# Altium PCB electrodes_interface_pcb.PcbDoc (part 4 of 4)
Units mm, origin at the board's own origin, x right, y up, seen from the top; angles counter-clockwise.
Board outline 433.27 x 43.31 mm, 4 copper layers (Top Layer, Signal Layer 1, Signal Layer 2, Bottom Layer), stack 1.308 mm thick; 42 components, 52 nets, 166 pads, 143 vias.
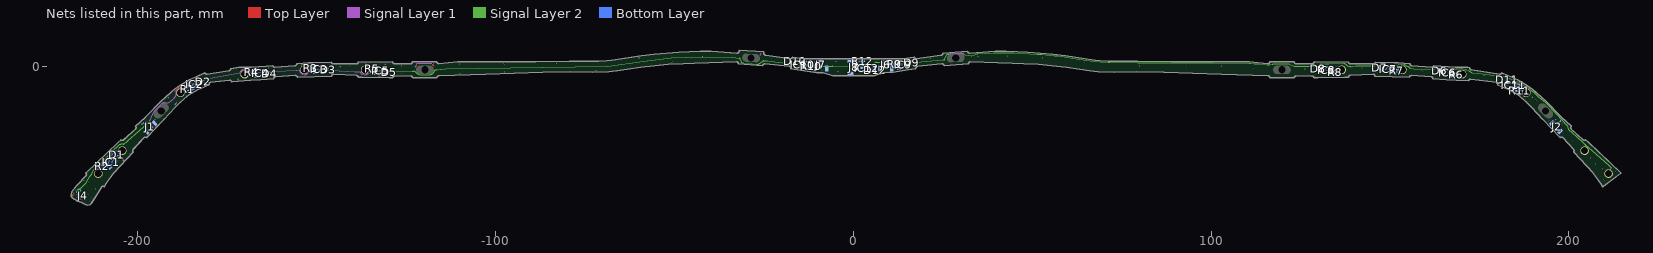
[diagram p6: the nets of this part, all layers, seen from the top]

## Via types
v1: diameter 0.4, hole 0.2, Top Layer to Bottom Layer, tented both sides, 143 vias

## Nets (pads, with @x,y where several pads share a name; then routed paths per layer and width w, separated by ;. In a path a pad name is that pad's centre, name@x,y a point inside that pad or via, vN(x,y) a via of type N, cw(c..) or ccw(c..) an arc to the next point about the centre after c; other vN are vias at no path point) (continued)
BIAS: J4.2 pad.1@204.398,-23.401 pad.1@211.098,-29.801 | length 467.7
  Signal Layer 1 w0.09: -153.874,-2.102 -153.576,-2.119 ccw(c-153.498,-0.801) -153.496,-2.121 -153.202,-2.121
  Signal Layer 1 w0.1: -153.216,-2.106 -153.178,-2.089 cw(c-153.136,-2.18) -153.162,-2.083
  Signal Layer 1 w0.12: -153.216,-2.106 ccw(c-153.498,-0.801) -153.118,-2.081 -152.881,-2.011 ccw(c-152.915,-1.896) -152.858,-2.001
  Signal Layer 1 w0.17: v1(-196.684,-15.228) -195.766,-12.895 -195.651,-12.648 cw(c-194.417,-13.22) -195.38,-12.26 -193.539,-10.419 cw(c-192.579,-11.382) -192.521,-10.023 -191.536,-10.065 ; -191.539,-10.068 -191.536,-10.065 ; -191.516,-10.066 -191.536,-10.065 ; -191.236,-9.802 -189.897,-8.688 ccw(c-190.005,-8.557) -189.873,-8.664 -189.457,-8.147 ccw(c-189.59,-8.04) -189.42,-8.033 -189.457,-7.267 cw(c-188.098,-7.201) -187.701,-5.901 -187.026,-6.107 ; -191.181,-9.763 -191.495,-10.03 -191.536,-10.065 ; -187.004,-6.116 ccw(c-187.096,-5.689) -186.82,-6.027 -186.799,-6.018 -186.798,-6.018 -183.778,-4.734 -180.571,-3.184 cw(c-180.497,-3.338) -180.526,-3.17 -180.135,-3.103 -172.283,-1.762 -171.631,-1.688 ccw(c-171.65,-1.519) -171.489,-1.573 cw(c-170.198,-2.001) -169.248,-1.028 -168.844,-1.423 ; -168.844,-1.423 ccw(c-168.726,-1.301) -168.785,-1.461 -168.399,-1.605 ; -168.455,-1.584 -161.973,-1.263 -161.478,-1.239 -155.819,-0.889 -155.66,-0.88 -155.038,-0.843 -154.865,-0.962 -154.836,-1.053 -154.823,-1.111 ccw(c-153.498,-0.801) -153.893,-2.103 ; -154.836,-1.053 -154.831,-1.072 ; -152.858,-2.001 ccw(c-153.498,-0.801) -152.146,-0.944 -152.131,-0.798 cw(c-151.969,-0.852) -151.999,-0.684 ; -151.998,-0.684 -151.896,-0.667 ; -151.892,-0.655 cw(c-151.537,-1.574) -151.197,-0.65 -149.898,-0.64 -145.774,-0.893 -139.425,-1.283 ; -139.424,-1.283 -138.474,-1.337 -138.063,-1.359 -137.441,-1.972 -137.353,-2.019 -137.27,-2.035 -136.762,-2.136 ccw(c-136.498,-0.801) -135.926,-2.035 ccw(c-136.498,-0.801) -135.916,-2.031 -135.133,-1.659 -134.577,-1.242 cw(c-134.346,-1.549) -134.358,-1.164 v1(-132.257,-1.099)
  Signal Layer 2 w0.095: 26.579,3.638 27.106,3.717 cw(c27.303,2.409) 27.205,3.728 27.738,3.768
  Signal Layer 2 w0.1: 27.738,3.768 29.804,3.912 cw(c29.897,2.591) 29.821,3.914 29.934,3.92 29.936,3.92
  Signal Layer 2 w0.11: 29.936,3.92 30.01,3.921 cw(c30.011,3.811) 30.012,3.921 30.013,3.921
  Signal Layer 2 w0.12: 30.013,3.921 30.15,3.916 cw(c30.146,3.796) 30.151,3.916 30.155,3.916
  Signal Layer 2 w0.15: 30.155,3.916 30.43,3.885
  Signal Layer 2 w0.17: -206.131,-22.631 ccw(c-206.25,-22.51) -206.127,-22.627 -205.697,-22.177 cw(c-204.398,-23.401) -204.122,-21.638 ; -204.121,-21.638 ccw(c-204.096,-21.47) -204,-21.611 ; -203.985,-21.594 -203.629,-21.356 ; -203.668,-21.386 -203.237,-21.094 ccw(c-203.332,-20.954) -203.205,-21.067 -202.991,-20.827 -202.879,-20.703 cw(c-202.704,-20.859) -202.86,-20.683 -199.598,-17.802 v1(-196.684,-15.228) ; v1(-132.257,-1.099) -131.754,-1.201 -131.483,-1.126 -131.101,-1.018 cw(c-130.929,-1.63) -130.916,-0.995 -128.726,-1.035 -128.722,-1.035 ; -128.721,-1.035 -128.028,-1.047 -123.3,-1.133 -122.94,-1.139 cw(c-122.953,-1.874) -122.443,-1.344 ; -122.475,-1.345 -122.065,-1.758 ccw(c-121.098,-0.801) -121.671,-2.035 ccw(c-121.098,-0.801) -121.098,-2.161 -118.498,-2.161 ccw(c-118.498,-0.801) -117.926,-2.035 ccw(c-118.498,-0.801) -117.297,-1.44 -117.1,-1.068 cw(c-116.95,-1.148) -117.077,-1.035 -116.97,-0.913 ; -116.974,-0.92 -116.97,-0.913 ; -116.899,-0.833 -116.921,-0.858 ; -116.4,-0.765 -116.876,-0.813 -116.921,-0.858 ; -116.97,-0.913 -116.959,-0.896 -116.921,-0.858 ; -116.97,-0.913 -116.921,-0.858
  Signal Layer 2 w0.2: v1(-217.14,-35.433) -217.095,-35.017 cw(c-216.698,-35.06) -217.074,-34.924 -216.904,-34.454 cw(c-216.528,-34.589) -216.812,-34.309 -216.721,-34.217 cw(c-216.579,-34.358) -216.587,-34.158 -216.428,-34.152 ; -216.427,-34.152 cw(c-216.42,-34.352) -216.346,-34.166 ; -216.345,-34.166 cw(c-216.42,-34.352) -216.34,-34.169 -216.33,-34.172 ccw(c-216.272,-33.98) -216.131,-34.122 -216.054,-34.047 -215.964,-33.959 ccw(c-216.104,-33.816) -215.959,-33.953 -214.49,-32.397 -213.357,-30.403 -213.007,-30.084 -212.873,-29.953 -212.68,-29.342 cw(c-212.489,-29.402) -212.661,-29.3 -212.474,-28.984 cw(c-211.098,-29.801) -212.036,-28.505 -211.82,-28.349 ccw(c-211.937,-28.187) -211.795,-28.327 -207.166,-23.65 -206.148,-22.621
  Signal Layer 2 w0.22: -30.61,1.105 -28.538,0.946 -28.357,0.922 ccw(c-28.329,1.14) -28.344,0.921 -26.982,0.819 -26.633,0.793
  Signal Layer 2 w0.25: -116.4,-0.765 -115.356,-0.659 -115.354,-0.658 -115.343,-0.658 -115.339,-0.658 -115.331,-0.658 ; -115.33,-0.658 -115.242,-0.655 -115.233,-0.646 -115.207,-0.643 -113.905,-0.511 -68.625,0.23 -68.609,0.232 -58.803,1.656 ; -58.802,1.656 cw(c-58.767,1.408) -58.795,1.657 -51.993,2.435 -50.954,2.554 ; -50.953,2.554 cw(c-50.925,2.305) -50.934,2.555 -42.198,2.854 cw(c-42.189,2.604) -42.183,2.854 -33.806,2.67 -31.854,2.413 cw(c-31.886,2.165) -31.694,2.325 ; -31.718,2.339 -31.71,2.319 -31.31,1.306 ccw(c-31.078,1.398) -31.101,1.149 ; -31.1,1.149 -30.614,1.106 ccw(c-30.591,1.355) -30.611,1.106 ; -26.543,0.801 ccw(c-26.524,1.05) -26.376,0.849 -25.283,1.657 -25.226,1.698 cw(c-25.117,1.474) -25.119,1.724 -24.997,1.725 -24.102,1.732 cw(c-24.1,1.482) -24.071,1.73 -20.929,1.363 cw(c-20.958,1.115) -20.922,1.362 -17.485,0.869 -17.08,0.811 -16.683,0.754 -14.203,0.328 cw(c-14.246,0.081) -14.097,0.282 -14.095,0.281 ccw(c-13.849,0.627) -13.846,0.202 -5.849,0.26 ; -5.848,0.26 cw(c-5.847,0.01) -5.842,0.26 2.57,0.108 2.582,0.109 4.49,0.226 ; 4.49,0.226 ccw(c4.474,0.475) 4.61,0.265 6.223,1.308 cw(c6.454,0.951) 6.453,1.376 7.274,1.377 cw(c7.275,1.127) 7.285,1.377 14.809,1.078 14.814,1.078 14.83,1.078 17.485,1.315 24.997,1.986 25.477,2.029 25.566,2.118 26.128,3.426 ; 26.128,3.427 cw(c26.358,3.328) 26.324,3.575 26.452,3.592 26.584,3.61 ; 30.43,3.885 30.432,3.885 cw(c30.361,3.645) 30.473,3.868 ; 30.474,3.868 30.532,3.838 cw(c29.897,2.591) 30.749,3.701 31.198,3.357 31.211,3.347 32.208,3.26 32.983,3.192 ccw(c33.004,3.441) 33.071,3.2 34.685,3.646 cw(c34.752,3.405) 34.733,3.654 36.891,3.815 39.27,3.991 39.771,4.028 ; 39.772,4.029 cw(c39.79,3.779) 39.795,4.029 44.94,3.928 cw(c44.935,3.678) 44.949,3.928 49.257,3.69 51.356,3.575 52.602,3.506 ; 52.603,3.506 cw(c52.589,3.257) 52.612,3.506 56.088,3.183 56.167,3.175 57.275,3.072 ; 57.275,3.072 cw(c57.251,2.823) 57.288,3.071 59.76,2.709 61.357,2.475 64.268,2.049 65.118,1.925 67.275,1.61 ; 67.275,1.61 ccw(c67.311,1.857) 67.28,1.609 68.948,1.403 ccw(c68.988,1.726) 68.958,1.402 68.973,1.401 ccw(c69.003,1.724) 68.988,1.4 71.181,1.3 ccw(c71.196,1.625) 71.186,1.3 71.191,1.3 ccw(c71.201,1.625) 71.198,1.3 71.604,1.296 79.422,1.225 ; 79.423,1.225 85.203,1.202 88.922,1.175 ; 88.924,1.175 100.918,1.133 110.603,1.099 cw(c110.603,0.849) 110.628,1.098 110.986,1.061 112.116,0.945 113.272,0.826 115.65,0.582 ccw(c115.676,0.83) 115.703,0.582 116.4,0.659 117.087,0.734 ccw(c116.966,1.837) 117.422,0.825 121.731,0.825 cw(c121.731,0.575) 121.826,0.807 122.683,0.453 cw(c122.588,0.222) 122.704,0.443 123.244,0.159 ccw(c123.36,0.38) 123.263,0.15 ccw(c123.36,0.38) 123.3,0.138 ccw(c123.36,0.38) 123.363,0.13 124.505,0.144 124.846,0.15 127.761,0.202 ; 127.762,0.202 cw(c127.766,-0.048) 127.775,0.202 128.726,0.167 128.752,0.166 129.201,0.15 129.681,0.133 ; 129.682,0.133 ccw(c129.69,0.383) 129.782,0.15 ccw(c129.69,0.383) 129.839,0.182 130.706,0.826 130.719,0.836 cw(c130.868,0.635) 130.863,0.885 132.899,0.927 cw(c132.904,0.677) 132.901,0.927 137.206,0.97 cw(c137.209,0.72) 137.361,0.918 137.481,0.826 138.064,0.378 ; 138.064,0.378 ccw(c138.216,0.577) 138.155,0.334 138.473,0.253 138.881,0.15 139.028,0.113 ; 139.029,0.112 ccw(c139.09,0.355) 139.125,0.107 139.43,0.15 140.407,0.287 ; 140.408,0.287 cw(c140.441,0.039) 140.441,0.289 145.608,0.289 ; 145.609,0.289 ccw(c145.608,0.539) 145.648,0.292 145.774,0.313 146.987,0.518 ; 146.988,0.518 cw(c147.029,0.271) 147.025,0.521 150.134,0.564 150.14,0.564 151.429,0.496 151.472,0.494 ; 151.473,0.494 153.104,0.725 cw(c153.139,0.478) 153.169,0.726 ; 153.169,0.726 154.051,0.617 cw(c154.021,0.369) 154.15,0.583 ; 154.151,0.582 154.86,0.15 155.073,0.101 ; 155.074,0.101 cw(c155.017,-0.142) 155.188,0.04 155.471,-0.227 155.54,-0.291 ; 155.541,-0.292 ccw(c155.711,-0.109) 155.66,-0.354 ccw(c155.711,-0.109) 155.684,-0.358 156.7,-0.464 ; 156.701,-0.464 ccw(c156.726,-0.216) 156.709,-0.465 161.796,-0.795 ; 161.796,-0.795 ccw(c161.812,-0.545) 161.903,-0.778 161.973,-0.75 162.222,-0.652 162.834,-0.411 cw(c162.926,-0.643) 162.93,-0.393 164.603,-0.421 ; 164.604,-0.421 cw(c164.599,-0.671) 164.609,-0.421 166.653,-0.502 166.824,-0.508 ; 166.824,-0.518 167.267,-0.529 ccw(c167.273,-0.279) 167.28,-0.529 170.129,-0.434 cw(c170.138,-0.683) 170.192,-0.439 ; 170.192,-0.44 171.268,-0.68 cw(c171.258,-0.93) 171.388,-0.716 172.048,-1.118 172.218,-1.222 ; 172.219,-1.223 ccw(c172.349,-1.008) 172.235,-1.231 172.283,-1.256 172.924,-1.586 ; 172.925,-1.586 ccw(c173.039,-1.364) 173.024,-1.613 174.643,-1.711 ; 174.644,-1.711 cw(c174.628,-1.961) 174.662,-1.713 176.984,-2.035 179.655,-2.406 cw(c179.62,-2.653) 179.682,-2.411 180.832,-2.705 ; 180.833,-2.705 ccw(c180.894,-2.463) 180.883,-2.712 181.148,-2.724 181.818,-2.754 cw(c181.807,-3.004) 181.868,-2.762 183.477,-3.171 cw(c183.415,-3.413) 183.515,-3.184 185.679,-4.124 ; 185.679,-4.121 185.719,-4.144 188.344,-5.636 cw(c188.221,-5.854) 188.358,-5.645 189.103,-6.139 cw(c188.965,-6.348) 189.136,-6.165 189.137,-6.166 190.274,-7.242 190.29,-7.257 190.469,-7.41 191.499,-8.293 192.183,-8.867 193.519,-9.986 ; 185.68,-4.124 cw(c185.58,-4.353) 185.718,-4.145 ; 193.52,-9.986 cw(c193.359,-10.177) 193.539,-10.005 196.645,-13.251 cw(c196.464,-13.424) 196.648,-13.254 199.489,-16.328 cw(c199.305,-16.498) 199.543,-16.42 199.875,-17.427 ccw(c200.112,-17.349) 199.898,-17.478 ccw(c200.112,-17.349) 199.955,-17.543 200.838,-18.265 ; 200.838,-18.266 cw(c200.68,-18.459) 200.848,-18.274 202.326,-19.617 202.349,-19.637 203.76,-20.919 ; 203.761,-20.919 ccw(c203.928,-20.734) 203.764,-20.922 203.992,-21.123 204.659,-21.712 204.661,-21.714 ; pad.1@204.398,-23.401 204.737,-21.957 ccw(c204.494,-21.9) 204.661,-21.714 ; pad.1@211.098,-29.801 211.883,-28.491 ccw(c211.669,-28.363) 211.85,-28.19 211.231,-27.546 ccw(c211.051,-27.719) 211.217,-27.532 ; 211.217,-27.532 206.475,-23.334 204.661,-21.714
  Bottom Layer w0.1: v1(-217.14,-35.433) -216.786,-35.787 -216.786,-35.947 -216.756,-35.976 -216.756,-36.05 -216.766,-36.06 -216.853,-36.247 J4.2@-216.917,-36.383
ELECTRODE_CONTACT_REF: pad.1@-204.398,-23.401 pad.1@-211.098,-29.801 R2.1 | length 10.3
  Bottom Layer w0.1: pad.1@-211.098,-29.801 -211.098,-28.343 R2.1@-210.24,-27.485 -209.955,-27.199 -209.955,-27.084 -206.272,-23.401 pad.1@-204.398,-23.401
ELECTRODE_EOG_CENTER: J8.1 J8.2 R12.1 | length 5.3
  Bottom Layer w0.1: J8.1@1.14,-0.425 0.69,-0.393 0.378,-0.393 cw(c0.378,-0.293) 0.278,-0.293 0.278,0.83 ; J8.2@1.14,0.375 0.69,0.44 0.531,0.44 cw(c0.531,0.54) 0.442,0.495 0.278,0.83 ; R12.1@2.2,1.625 2,1.595 1.616,1.595 ccw(c1.616,1.495) 1.569,1.583 0.33,0.918 ccw(c0.378,0.83) 0.278,0.83
ELECTRODE_EOG_L: J7.1 J7.2 R10.1 | length 5.8
  Bottom Layer w0.1: R10.1@-11.729,0.522 -11.678,0.717 -11.641,1.023 ; -11.641,1.023 cw(c-11.541,1.011) -11.571,1.106 -10.893,1.314 cw(c-10.864,1.219) -10.807,1.301 -10.128,0.826 ; -10.128,0.826 cw(c-10.185,0.744) -10.118,0.818 -9.723,0.462 ; -9.723,0.462 ccw(c-9.656,0.536) -9.581,0.47 ; J7.2@-9.5,1.515 -9.47,1.065 -9.47,0.633 cw(c-9.57,0.633) -9.496,0.567 -9.581,0.47 ; J7.1@-8.7,1.515 -8.691,1.065 -8.691,0.698 cw(c-8.791,0.698) -8.776,0.599 -9.581,0.47
ELECTRODE_EOG_R: J6.1 J6.2 R9.1 | length 5
  Bottom Layer w0.1: J6.2@8.7,1.515 8.661,1.065 8.661,0.813 ccw(c8.761,0.813) 8.734,0.717 9.167,0.597 ; 9.168,0.597 ccw(c9.194,0.694) 9.208,0.595 9.804,0.68 ; J6.1@9.5,1.515 9.472,1.065 9.472,0.949 ccw(c9.572,0.949) 9.518,0.864 9.804,0.68 ; 10.399,0.766 9.804,0.68 ; 10.4,0.766 cw(c10.413,0.667) 10.421,0.766 11.202,0.702 cw(c11.194,0.602) 11.22,0.699 11.573,0.605 R9.1@11.771,0.428
ELECTRODE_TEMPLE_L_1: pad.1@-188.098,-7.201 R1.1 | length 2.3
  Bottom Layer w0.1: pad.1@-188.098,-7.201 -186.628,-6.982 ccw(c-186.643,-6.883) -186.593,-6.969 -186.102,-6.686 R1.1@-185.95,-6.6
ELECTRODE_TEMPLE_L_2: pad.1@-170.198,-2.001 R4.1 | length 2
  Bottom Layer w0.1: pad.1@-170.198,-2.001 -168.403,-1.876 R4.1@-168.224,-1.924
ELECTRODE_TEMPLE_L_3: pad.1@-153.498,-0.801 R3.1 | length 1.8
  Bottom Layer w0.1: pad.1@-153.498,-0.801 -151.855,-0.715 R3.1@-151.68,-0.699
ELECTRODE_TEMPLE_L_4: pad.1@-136.498,-0.801 R5.1 | length 2
  Bottom Layer w0.1: pad.1@-136.498,-0.801 -134.675,-0.801 R5.1@-134.5,-0.85
ELECTRODE_TEMPLE_R_1: pad.1@188.098,-7.201 R11.1 | length 1.8
  Bottom Layer w0.1: R11.1@186.494,-6.394 186.697,-6.392 pad.1@188.098,-7.201
ELECTRODE_TEMPLE_R_2: pad.1@170.198,-2.001 R6.1 | length 1.7
  Bottom Layer w0.1: R6.1@168.583,-1.791 168.751,-1.9 pad.1@170.198,-2.001
ELECTRODE_TEMPLE_R_3: pad.1@153.498,-0.801 R7.1 | length 1.6
  Bottom Layer w0.1: R7.1@151.863,-0.71 152.037,-0.75 pad.1@153.498,-0.801
ELECTRODE_TEMPLE_R_4: pad.1@136.498,-0.801 R8.1 | length 2
  Bottom Layer w0.1: R8.1@134.638,-1.041 134.813,-0.841 pad.1@136.498,-0.801
GND: IC1.2 IC2.2 IC3.2 IC4.2 IC5.2 IC6.2 IC7.2 IC8.2 IC9.2 IC10.2 IC11.2 IC12.2 J1.2 J1.3 J1.4 J2.2 J2.3 J2.4 J4.1 J6.3 J6.4 J7.3 J7.4 J8.3 J8.4 | length 49.6
  Top Layer w0.203: -189.517,-6.812 -189.212,-6.392 ; -189.212,-6.392 cw(c-188.098,-7.201) -188.507,-5.887 -188.158,-5.778
  Top Layer w0.3: v1(-218.194,-35.829) -217.864,-35.237 ; v1(-216.063,-37.333) -216.048,-36.805 ; -204.514,-25.467 v1(-204.163,-26.063) ; -195.858,-16.56 v1(-195.819,-17.154) ; v1(-189.268,-10.312) -189.145,-9.698 ; v1(-186.879,-4.896) -186.541,-5.746 ; -181.404,-4.244 v1(-181.155,-5.027) ; v1(-151.994,0.632) -151.969,-0.084 ; -132.662,-1.949 v1(-132.507,-2.528) ; -122.175,0.296 -122.071,0.4 -122.071,0.963 v1(-122.052,0.982) ; v1(-117.637,1.008) -117.618,0.989 -117.618,0.489 -117.416,0.287 ; -26.077,3.334 v1(-25.898,3.846) ; v1(-14.453,-0.436) -13.625,-0.201
  Signal Layer 1 w0.075: 26.62,3.604 27.026,3.692 cw(c27.303,2.409) 27.212,3.719 29.805,3.9 cw(c29.897,2.591) 29.962,3.902 30.124,3.893 30.857,3.857
  Signal Layer 1 w0.08: -154.377,0.626 -153.945,0.751 cw(c-153.498,-0.801) -153.361,0.808 -152.745,0.755
  Signal Layer 1 w0.095: 26.454,3.593 27.053,3.708 cw(c27.303,2.409) 27.211,3.729 29.805,3.91 cw(c29.897,2.591) 30.124,3.893 cw(c29.897,2.591) 30.238,3.868 30.668,3.754
  Signal Layer 1 w0.15: v1(-132.507,-2.528) -131.87,-2.623 ccw(c-131.847,-2.475) -131.853,-2.625 -131.362,-2.643 ; v1(-122.052,0.982) -122.015,1.019 -121.364,1.019 cw(c-121.354,0.869) -121.356,1.019 -118.313,1.06 -118.056,1.06 -118.053,1.056 -117.685,1.056 v1(-117.637,1.008)
  Signal Layer 2 w0.08: -154.398,0.673 -153.797,0.786 cw(c-153.498,-0.801) -153.373,0.809 -152.763,0.761
  Bottom Layer w0.1: v1(-216.528,-34.589) -216.233,-34.698 ccw(c-216.199,-34.604) -216.128,-34.675 J4.1@-216.114,-34.661
  Bottom Layer w0.3: IC1.2@-208.39,-27.571 -208.195,-27.164 v1(-208.006,-25.888) ; -204.404,-25.494 v1(-204.163,-26.063) ; v1(-198.881,-16.001) -198.476,-15.761 J1.2@-198.152,-15.926 ; -196.034,-16.539 v1(-195.819,-17.154) ; -189.599,-10.522 v1(-189.268,-10.312) ; IC2.2@-185.279,-5.462 -184.974,-5.13 v1(-184.443,-4.519) ; v1(-181.155,-5.027) -180.96,-4.848 ccw(c-181.129,-4.664) -180.879,-4.685 ; v1(-167.765,-2.657) -167.72,-2.448 cw(c-167.475,-2.501) -167.663,-2.336 -167.36,-1.991 IC4.2@-166.947,-1.812 ; -152.471,0.339 v1(-151.994,0.632) ; v1(-151.476,-1.59) -151.47,-1.366 ccw(c-151.77,-1.358) -151.47,-1.358 -151.271,-1.159 -151.065,-1.093 ccw(c-151.17,-0.812) -150.959,-1.026 ; -150.959,-1.025 IC3.2@-150.623,-0.69 ; v1(-134.346,-1.549) -133.954,-1.301 IC5.2@-133.429,-1.051 ; -122.435,0.052 -122.071,0.416 -122.071,0.963 v1(-122.052,0.982) ; v1(-117.637,1.008) -117.618,0.989 -117.618,0.574 -117.479,0.435 ; -25.965,3.246 v1(-25.898,3.846) ; v1(-14.453,-0.436) -14.006,-0.09 ; v1(-13.849,0.627) IC10.2@-12.859,0.473 ; IC12.2@2.55,-0.325 3.075,-0.309 v1(3.546,-0.309) ; IC9.2@12.834,0.498 13.35,0.609 13.752,0.658 13.796,0.614 v1(13.796,0.555) ; v1(132.333,-0.898) 132.925,-0.898 IC8.2@133.35,-0.925 ; v1(149.741,-0.573) IC7.2@150.674,-0.594 ; v1(166.267,-1.6) 166.766,-1.635 IC6.2@167.191,-1.652 ; v1(184.58,-5.274) 184.6,-5.293 184.842,-5.293 185.132,-5.583 185.174,-5.583 IC11.2@185.233,-5.525 ; v1(196.754,-15.968) 197.244,-15.495 J2.2@197.512,-15.269
  other v1: -211.773,-34.035 -213.835,-32.517 -215.163,-31.859 209.923,-31.503 212.983,-29.493 209.321,-28.445 -210.198,-28.293 207.552,-27.067 205.972,-25.328 201.101,-20.326 194.544,-15.219 196.39,-14.789 -195.355,-14.585 190.722,-9.338 -191.554,-8.668 189.75,-8.425 187.126,-5.931 182.082,-4.989 -172.043,-3.401 166.386,-3.019 -182.77,-2.915 176.37,-2.51 132.465,-2.365 149.81,-2.163 -126.268,-2.082 -110.033,-1.736 1.18,-1.478 6.843,-1.478 -97.664,-1.302 158.868,-1.245 -4.405,-1.154 168.782,-1.134 -72.07,-0.896 -8.839,-0.79 -171.624,-0.707 126.169,-0.564 9.252,-0.505 -163.625,-0.398 142.099,-0.374 111.774,-0.2 -140.867,-0.092 -143.471,0.018 134.83,0.069 93.342,0.133 102.812,0.164 80.073,0.37 -126.234,0.385 -147.298,0.614 -110.202,0.707 -130.913,0.771 -136.281,0.834 -97.583,0.941 -83.257,0.969 64.855,1.178 -50.798,1.501 -4.847,1.521 4.847,1.585 -11.592,1.649 10.983,1.678 21.494,2.278 -59.93,2.529 52.963,2.587 34.959,2.793 42.987,2.983 -39.667,4.032
NetD1_1: D1.1 IC1.1 | length 4.2
  Bottom Layer w0.1: IC1.1@-207.718,-28.243 -207.151,-27.676 -207.151,-26.397 D1.1@-205.664,-24.911
NetD2_1: D2.1 IC2.1 | length 4.1
  Bottom Layer w0.1: IC2.1@-184.833,-6.301 -184.387,-6.02 -183.983,-5.805 ccw(c-184.03,-5.717) -183.934,-5.746 -183.633,-4.744 cw(c-183.537,-4.773) -183.584,-4.684 -182.103,-3.897 D2.1@-181.923,-3.756
NetD3_1: D3.1 IC3.1 | length 4.2
  Bottom Layer w0.1: IC3.1@-150.574,-1.639 -150.05,-1.603 -149.764,-1.588 ; -149.764,-1.588 ccw(c-149.77,-1.488) -149.694,-1.553 -148.833,-0.559 cw(c-148.758,-0.625) -148.763,-0.525 -147.096,-0.437 D3.1@-146.875,-0.351
NetD4_1: D4.1 IC4.1 | length 4.3
  Bottom Layer w0.1: IC4.1@-166.881,-2.76 -166.359,-2.699 -165.903,-2.667 ccw(c-165.91,-2.568) -165.821,-2.613 -165.352,-1.693 cw(c-165.263,-1.739) -165.27,-1.639 ; -165.27,-1.639 -163.38,-1.507 D4.1@-163.158,-1.451
NetD5_1: D5.1 IC5.1 | length 4.1
  Bottom Layer w0.1: IC5.1@-133.429,-2.001 -132.904,-1.977 -132.364,-1.977 ccw(c-132.364,-1.877) -132.292,-1.946 -131.474,-1.105 cw(c-131.402,-1.175) -131.402,-1.075 -129.95,-1.075 D5.1@-129.725,-1.025
NetD6_1: D6.1 IC6.1 | length 3.9
  Bottom Layer w0.1: D6.1@163.897,-1.485 164.133,-1.328 165.375,-1.415 ccw(c165.382,-1.315) 165.444,-1.393 166.276,-0.736 cw(c166.338,-0.815) 166.345,-0.715 166.99,-0.76 IC6.1@167.518,-0.733
NetD7_1: D7.1 IC7.1 | length 3.9
  Bottom Layer w0.1: D7.1@147.277,-0.641 147.502,-0.619 148.701,-0.661 ccw(c148.705,-0.561) 148.776,-0.631 149.545,0.15 149.644,0.25 cw(c149.715,0.18) 149.718,0.28 150.286,0.26 IC7.1@150.813,0.325
NetD8_1: D8.1 IC8.1 | length 3.9
  Bottom Layer w0.1: D8.1@130.043,-0.914 130.268,-0.962 130.98,-0.962 ccw(c130.98,-0.862) 131.013,-0.956 131.574,-0.756 ccw(c131.54,-0.661) 131.603,-0.74 132.531,0.001 cw(c132.594,-0.077) 132.594,0.023 133.058,0.023 IC8.1@133.583,0.052
NetD9_1: D9.1 IC9.1 | length 4.5
  Bottom Layer w0.1: IC9.1@12.95,-0.445 13.474,-0.4 14.047,-0.33 ccw(c14.035,-0.231) 14.129,-0.265 14.45,0.633 ; 14.45,0.633 cw(c14.545,0.6) 14.508,0.693 15.7,1.151 ; 15.622,1.099 cw(c15.548,1.166) 15.584,1.073 15.653,1.1 15.7,1.151 ; 15.734,1.165 15.7,1.151 ; D9.1@16.192,1.705 16.083,1.573 15.7,1.151
NetD10_1: D10.1 IC10.1 | length 4
  Bottom Layer w0.1: D10.1@-16.283,1.154 -16.066,1.199 -16.041,1.194 -14.536,0.739 -14.246,0.739 -14.041,0.944 -13.691,1.376 -13.661,1.451 cw(c-13.568,1.414) -13.556,1.514 -13.265,1.478 IC10.1@-12.744,1.416
NetD11_1: D11.1 IC11.1 | length 3.8
  Bottom Layer w0.1: D11.1@182.482,-3.974 182.661,-4.114 183.509,-4.604 ccw(c183.559,-4.517) 183.542,-4.616 ; 183.542,-4.616 184.364,-4.757 ccw(c184.382,-4.658) 184.369,-4.757 185.525,-4.9 IC11.1@186.105,-4.946
NetD12_1: D12.1 IC12.1 | length 3.9
  Bottom Layer w0.1: IC12.1@2.55,-1.275 3.075,-1.166 3.479,-1.166 ccw(c3.479,-1.066) 3.544,-1.142 4.32,-0.475 cw(c4.385,-0.55) 4.385,-0.45 5.95,-0.45 D12.1@6.175,-0.4
NetIC1_3: IC1.3 R2.2 | length 1.4
  Bottom Layer w0.1: R2.2@-209.71,-28.015 -209.71,-27.893 -209.061,-27.245 IC1.3@-209.061,-26.899
NetIC2_3: IC2.3 R1.2 | length 1.5
  Bottom Layer w0.1: R1.2@-186.325,-5.95 -186.273,-5.689 -186.071,-5.09 IC2.3@-185.725,-4.623
NetIC3_3: IC3.3 R3.2 | length 1.1
  Bottom Layer w0.1: R3.2@-151.72,0.049 -151.549,0.136 -151.193,0.154 IC3.3@-150.673,0.258
NetIC4_3: IC4.3 R4.2 | length 1.3
  Bottom Layer w0.1: R4.2@-168.276,-1.176 -168.111,-1.033 -167.531,-0.992 IC4.3@-167.013,-0.865
NetIC5_3: IC5.3 R5.2 | length 1.1
  Bottom Layer w0.1: R5.2@-134.5,-0.1 -134.325,-0.101 -133.954,-0.101 IC5.3@-133.429,-0.101
NetIC6_3: IC6.3 R6.2 | length 1.2
  Bottom Layer w0.1: IC6.3@167.386,-2.628 167.919,-2.522 168.354,-2.553 R6.2@168.53,-2.539
NetIC7_3: IC7.3 R7.2 | length 1.1
  Bottom Layer w0.1: IC7.3@150.747,-1.574 151.276,-1.465 151.661,-1.478 R7.2@151.837,-1.46
NetIC8_3: IC8.3 R8.2 | length 1.1
  Bottom Layer w0.1: IC8.3@133.583,-1.848 134.108,-1.801 134.463,-1.801 R8.2@134.638,-1.791
NetIC9_3: IC9.3 R9.2 | length 1.1
  Bottom Layer w0.1: R9.2@11.679,1.172 11.85,1.216 12.212,1.261 IC9.3@12.719,1.441
NetIC10_3: IC10.3 R10.2 | length 1.2
  Bottom Layer w0.1: IC10.3@-12.975,-0.47 -12.424,-0.286 -12.011,-0.337 R10.2@-11.821,-0.222
NetIC11_3: IC11.3 R11.2 | length 1.1
  Bottom Layer w0.1: IC11.3@185.155,-6.591 185.632,-6.815 185.945,-6.996 R11.2@186.119,-7.044
NetIC12_3: IC12.3 R12.2 | length 1.2
  Bottom Layer w0.1: IC12.3@2.55,0.625 2.88,0.875 2.88,1.45 R12.2@2.95,1.625
pads on no net: J4.17 J4.18 J4.19 J4.20

## Polygon pours and split planes (outlines as drawn)
no net on Layer0 "Default Coverlay 2 Top" (split plane): 102.777,-2.098 115.841,-2.498 115.927,-2.496 116.095,-2.531 116.243,-2.617 116.359,-2.744 116.4,-2.819 116.4,1.252 116.36,1.183 116.253,1.067 116.117,0.986 115.964,0.947 115.884,0.945 115.882,0.945 110.622,1.425 88.925,1.5 88.892,1.512 79.425,1.55 79.424,1.55 71.201,1.625 71.196,1.625 69.003,1.724 68.988,1.726 67.593,1.925 67.592,1.925 63.842,2.475 59.294,3.175 59.292,3.175 55.696,3.575 55.694,3.575 48.798,4.15 48.796,4.15 45.848,4.275 42.749,4.375 42.748,4.375 39.728,4.45 32.545,3.815 32.541,3.814 32.466,3.819 32.322,3.86 32.194,3.937 32.091,4.046 32.052,4.11 32.208,1.167 32.236,1.228 32.313,1.338 32.414,1.427 32.534,1.488 32.598,1.507 32.612,1.508 40.404,1.2 44.451,1.075 44.453,1.075 47.576,0.95 47.579,0.95 51.726,0.7 51.732,0.7 55.504,0.35 55.506,0.35 59.478,-0.05 59.485,-0.051 63.256,-0.625 63.26,-0.626 66.105,-1.125 66.109,-1.125 68.377,-1.35 68.38,-1.35 72.899,-1.475 72.902,-1.475 79.219,-1.369 79.221,-1.369 86.85,-1.494 86.87,-1.498
no net on Layer0 "Default Coverlay 2 Top" (split plane): -32.612,1.508 -32.598,1.507 -32.534,1.488 -32.414,1.427 -32.313,1.338 -32.236,1.228 -32.208,1.167 -32.052,4.11 -32.091,4.046 -32.194,3.937 -32.322,3.86 -32.466,3.819 -32.541,3.814 -32.545,3.815 -39.728,4.45 -42.748,4.375 -42.749,4.375 -45.848,4.275 -48.796,4.15 -48.798,4.15 -55.694,3.575 -55.696,3.575 -59.292,3.175 -59.294,3.175 -63.842,2.475 -67.592,1.925 -67.593,1.925 -68.988,1.726 -69.003,1.724 -71.196,1.625 -71.201,1.625 -79.424,1.55 -79.425,1.55 -88.892,1.512 -88.925,1.5 -110.622,1.425 -115.882,0.945 -115.884,0.945 -115.964,0.947 -116.117,0.986 -116.253,1.067 -116.36,1.183 -116.4,1.252 -116.4,-2.819 -116.359,-2.744 -116.243,-2.617 -116.095,-2.531 -115.927,-2.496 -115.841,-2.498 -102.777,-2.098 -86.87,-1.498 -86.85,-1.494 -79.221,-1.369 -79.219,-1.369 -72.902,-1.475 -72.899,-1.475 -68.38,-1.35 -68.377,-1.35 -66.109,-1.125 -66.105,-1.125 -63.26,-0.626 -63.256,-0.625 -59.485,-0.051 -59.478,-0.05 -55.506,0.35 -55.504,0.35 -51.732,0.7 -51.726,0.7 -47.579,0.95 -47.576,0.95 -44.453,1.075 -44.451,1.075 -40.404,1.2
no net on Layer0 "Default Coverlay 2 Top" (split plane): -145.284,-2.035 -138.96,-2.358 -138.884,-2.365 -138.739,-2.408 -138.612,-2.49 -138.511,-2.603 -138.474,-2.669 -138.449,1.165 -138.487,1.099 -138.59,0.985 -138.72,0.905 -138.867,0.863 -138.943,0.857 -145.359,0.834 -145.436,0.837 -145.587,0.874 -145.721,0.953 -145.828,1.065 -145.869,1.132 -145.774,-2.377 -145.739,-2.307 -145.642,-2.185 -145.514,-2.095 -145.366,-2.044 -145.289,-2.035
no net on Layer0 "Default Coverlay 2 Top" (split plane): 145.289,-2.035 145.366,-2.044 145.514,-2.095 145.642,-2.185 145.739,-2.307 145.774,-2.377 145.869,1.132 145.828,1.065 145.721,0.953 145.587,0.874 145.436,0.837 145.359,0.834 138.943,0.857 138.867,0.863 138.72,0.905 138.59,0.985 138.487,1.099 138.449,1.165 138.473,-2.669 138.511,-2.603 138.612,-2.49 138.739,-2.408 138.884,-2.365 138.96,-2.358 145.284,-2.035
no net on Layer0 "Default Coverlay 2 Top" (split plane): 179.725,-4.317 179.732,-4.319 179.813,-4.348 179.957,-4.444 180.064,-4.579 180.124,-4.741 180.135,-4.827 181.148,-1.856 181.092,-1.904 180.964,-1.976 180.821,-2.01 180.674,-2.006 180.602,-1.989 172.713,-0.783 172.712,-0.783 172.642,-0.767 172.51,-0.71 172.398,-0.619 172.313,-0.503 172.283,-0.438 172.048,-3.709 172.086,-3.646 172.187,-3.539 172.312,-3.462 172.453,-3.421 172.526,-3.415 172.533,-3.416
no net on Layer0 "Default Coverlay 2 Top" (split plane): -209.812,-33.378 -209.798,-33.378 -209.77,-33.379 -209.743,-33.382 -209.715,-33.386 -209.701,-33.389 -214.452,-29.78 -214.437,-29.81 -214.413,-29.872 -214.397,-29.937 -214.389,-30.004 -214.388,-30.037 -214.39,-30.082 -214.405,-30.172 -214.435,-30.258 -214.478,-30.338 -214.504,-30.375 -214.534,-30.393 -217.044,-33.057 -212.659,-35.251 -211.561,-35.8 -210.175,-33.519 -210.144,-33.489 -210.107,-33.464 -210.029,-33.422 -209.944,-33.394 -209.857,-33.379
no net on Layer0 "Default Coverlay 2 Top" (split plane): -198.275,-19.718 -198.269,-19.712 -198.21,-19.674 -198.082,-19.62 -197.944,-19.601 -197.806,-19.617 -197.739,-19.637 -200.551,-16.849 -200.545,-16.87 -200.535,-16.912 -200.528,-16.954 -200.524,-16.997 -200.524,-17.019 -200.526,-17.064 -200.541,-17.154 -200.57,-17.24 -200.613,-17.32 -200.64,-17.357 -200.646,-17.363 -203.976,-20.374 -204.037,-20.433 -204.182,-20.52 -204.347,-20.558 -204.515,-20.545 -204.596,-20.519 -201.427,-23.627 -201.452,-23.549 -201.465,-23.385 -201.428,-23.224 -201.346,-23.082 -201.29,-23.021
no net on Layer0 "Default Coverlay 2 Top" (split plane): 198.275,-19.718 201.29,-23.021 201.33,-23.062 201.395,-23.154 201.44,-23.257 201.463,-23.368 201.466,-23.424 201.465,-23.45 201.461,-23.502 201.451,-23.553 201.436,-23.603 201.427,-23.627 204.596,-20.519 204.515,-20.545 204.347,-20.558 204.182,-20.52 204.037,-20.433 203.976,-20.374 200.646,-17.363 200.64,-17.357 200.602,-17.302 200.548,-17.179 200.525,-17.047 200.534,-16.914 200.551,-16.849 197.739,-19.637 197.806,-19.617 197.944,-19.601 198.082,-19.62 198.21,-19.674 198.269,-19.712
no net on Layer0 "Default Coverlay 2 Top" (split plane): 128.224,-2.54 128.302,-2.546 128.454,-2.591 128.586,-2.677 128.689,-2.796 128.726,-2.866 128.752,1.222 128.712,1.152 128.605,1.033 128.468,0.951 128.314,0.911 128.234,0.908 123.805,0.878 123.726,0.884 123.573,0.929 123.44,1.016 123.337,1.138 123.3,1.208 123.3,-2.81 123.337,-2.743 123.438,-2.628 123.567,-2.545 123.713,-2.501 123.789,-2.495 123.791,-2.495 128.166,-2.543 128.173,-2.542 128.187,-2.541 128.202,-2.541 128.216,-2.54
no net on Layer0 "Default Coverlay 2 Top" (split plane): -123.791,-2.495 -123.789,-2.495 -123.713,-2.501 -123.567,-2.545 -123.438,-2.628 -123.337,-2.743 -123.3,-2.81 -123.3,1.208 -123.337,1.138 -123.44,1.016 -123.573,0.929 -123.726,0.884 -123.805,0.878 -128.234,0.908 -128.314,0.911 -128.468,0.951 -128.605,1.033 -128.712,1.152 -128.752,1.222 -128.726,-2.866 -128.685,-2.79 -128.57,-2.663 -128.42,-2.577 -128.252,-2.541 -128.166,-2.543
no net on Layer0 "Default Coverlay 2 Top" (split plane): 17.899,0.15 24.736,0.854 24.818,0.857 24.979,0.826 25.123,0.75 25.239,0.634 25.283,0.565 24.997,3.651 24.962,3.571 24.857,3.432 24.714,3.333 24.546,3.283 24.459,3.279 17.603,2.355 17.602,2.354 17.527,2.35 17.378,2.373 17.242,2.435 17.127,2.531 17.08,2.59 17.485,-0.245 17.509,-0.175 17.584,-0.047 17.691,0.057 17.821,0.127 17.892,0.149
no net on Layer0 "Default Coverlay 2 Top" (split plane): -17.899,0.15 -17.892,0.149 -17.821,0.127 -17.691,0.057 -17.584,-0.047 -17.509,-0.175 -17.485,-0.245 -17.08,2.59 -17.127,2.531 -17.242,2.435 -17.378,2.373 -17.527,2.35 -17.602,2.354 -17.603,2.355 -24.459,3.279 -24.546,3.283 -24.714,3.333 -24.857,3.432 -24.962,3.571 -24.997,3.651 -25.283,0.565 -25.239,0.634 -25.123,0.75 -24.979,0.826 -24.818,0.857 -24.736,0.854
no net on Layer0 "Default Coverlay 2 Top" (split plane): -155.957,-2.388 -155.954,-2.388 -155.879,-2.394 -155.737,-2.436 -155.61,-2.515 -155.51,-2.624 -155.471,-2.688 -155.66,0.712 -155.687,0.639 -155.771,0.507 -155.888,0.405 -156.029,0.339 -156.105,0.322 -156.109,0.321 -161.726,-0.101 -161.728,-0.101 -161.802,-0.099 -161.945,-0.066 -162.074,0.004 -162.181,0.107 -162.222,0.167 -161.973,-3.057 -161.942,-2.989 -161.853,-2.869 -161.737,-2.777 -161.599,-2.72 -161.526,-2.706 -161.523,-2.706
no net on Layer0 "Default Coverlay 2 Top" (split plane): 155.471,-2.688 155.51,-2.624 155.61,-2.515 155.737,-2.436 155.879,-2.394 155.954,-2.388 155.957,-2.388 161.523,-2.706 161.526,-2.706 161.599,-2.72 161.737,-2.777 161.853,-2.869 161.942,-2.989 161.973,-3.057 162.222,0.167 162.181,0.107 162.074,0.004 161.945,-0.066 161.802,-0.099 161.728,-0.101 161.726,-0.101 156.109,0.321 156.105,0.322 156.029,0.339 155.888,0.405 155.771,0.507 155.687,0.639 155.66,0.712
no net on Layer0 "Default Coverlay 2 Top" (split plane): -179.725,-4.317 -174.412,-3.651 -174.303,-3.674 -174.097,-3.761 -173.922,-3.899 -173.79,-4.078 -173.743,-4.179 -174.001,-0.445 -174.036,-0.553 -174.147,-0.752 -174.306,-0.915 -174.501,-1.032 -174.609,-1.07 -180.602,-1.989 -180.674,-2.006 -180.821,-2.01 -180.964,-1.976 -181.092,-1.904 -181.148,-1.856 -180.135,-4.827 -180.124,-4.741 -180.064,-4.579 -179.957,-4.444 -179.813,-4.348 -179.732,-4.319
no net on Layer0 "Default Coverlay 2 Bottom" (split plane): 102.777,-2.098 115.841,-2.498 115.927,-2.496 116.095,-2.531 116.243,-2.617 116.359,-2.744 116.4,-2.819 116.4,1.252 116.36,1.183 116.253,1.067 116.117,0.986 115.964,0.947 115.884,0.945 115.882,0.945 110.622,1.425 88.925,1.5 88.892,1.512 79.425,1.55 79.424,1.55 71.201,1.625 71.196,1.625 69.003,1.724 68.988,1.726 67.593,1.925 67.592,1.925 63.842,2.475 59.294,3.175 59.292,3.175 55.696,3.575 55.694,3.575 48.798,4.15 48.796,4.15 45.848,4.275 42.749,4.375 42.748,4.375 39.728,4.45 32.545,3.815 32.541,3.814 32.466,3.819 32.322,3.86 32.194,3.937 32.091,4.046 32.052,4.11 32.208,1.167 32.236,1.228 32.313,1.338 32.414,1.427 32.534,1.488 32.598,1.507 32.612,1.508 40.404,1.2 44.451,1.075 44.453,1.075 47.576,0.95 47.579,0.95 51.726,0.7 51.732,0.7 55.504,0.35 55.506,0.35 59.478,-0.05 59.485,-0.051 63.256,-0.625 63.26,-0.626 66.105,-1.125 66.109,-1.125 68.377,-1.35 68.38,-1.35 72.899,-1.475 72.902,-1.475 79.219,-1.369 79.221,-1.369 86.85,-1.494 86.87,-1.498
no net on Layer0 "Default Coverlay 2 Bottom" (split plane): -32.612,1.508 -32.598,1.507 -32.534,1.488 -32.414,1.427 -32.313,1.338 -32.236,1.228 -32.208,1.167 -32.052,4.11 -32.091,4.046 -32.194,3.937 -32.322,3.86 -32.466,3.819 -32.541,3.814 -32.545,3.815 -39.728,4.45 -42.748,4.375 -42.749,4.375 -45.848,4.275 -48.796,4.15 -48.798,4.15 -55.694,3.575 -55.696,3.575 -59.292,3.175 -59.294,3.175 -63.842,2.475 -67.592,1.925 -67.593,1.925 -68.988,1.726 -69.003,1.724 -71.196,1.625 -71.201,1.625 -79.424,1.55 -79.425,1.55 -88.892,1.512 -88.925,1.5 -110.622,1.425 -115.882,0.945 -115.884,0.945 -115.964,0.947 -116.117,0.986 -116.253,1.067 -116.36,1.183 -116.4,1.252 -116.4,-2.819 -116.359,-2.744 -116.243,-2.617 -116.095,-2.531 -115.927,-2.496 -115.841,-2.498 -102.777,-2.098 -86.87,-1.498 -86.85,-1.494 -79.221,-1.369 -79.219,-1.369 -72.902,-1.475 -72.899,-1.475 -68.38,-1.35 -68.377,-1.35 -66.109,-1.125 -66.105,-1.125 -63.26,-0.626 -63.256,-0.625 -59.485,-0.051 -59.478,-0.05 -55.506,0.35 -55.504,0.35 -51.732,0.7 -51.726,0.7 -47.579,0.95 -47.576,0.95 -44.453,1.075 -44.451,1.075 -40.404,1.2
no net on Layer0 "Default Coverlay 2 Bottom" (split plane): -145.284,-2.035 -138.96,-2.358 -138.884,-2.365 -138.739,-2.408 -138.612,-2.49 -138.511,-2.603 -138.474,-2.669 -138.449,1.165 -138.487,1.099 -138.59,0.985 -138.72,0.905 -138.867,0.863 -138.943,0.857 -145.359,0.834 -145.436,0.837 -145.587,0.874 -145.721,0.953 -145.828,1.065 -145.869,1.132 -145.774,-2.377 -145.739,-2.307 -145.642,-2.185 -145.514,-2.095 -145.366,-2.044 -145.289,-2.035
no net on Layer0 "Default Coverlay 2 Bottom" (split plane): 145.289,-2.035 145.366,-2.044 145.514,-2.095 145.642,-2.185 145.739,-2.307 145.774,-2.377 145.869,1.132 145.828,1.065 145.721,0.953 145.587,0.874 145.436,0.837 145.359,0.834 138.943,0.857 138.867,0.863 138.72,0.905 138.59,0.985 138.487,1.099 138.449,1.165 138.473,-2.669 138.511,-2.603 138.612,-2.49 138.739,-2.408 138.884,-2.365 138.96,-2.358 145.284,-2.035
no net on Layer0 "Default Coverlay 2 Bottom" (split plane): 179.725,-4.317 179.732,-4.319 179.813,-4.348 179.957,-4.444 180.064,-4.579 180.124,-4.741 180.135,-4.827 181.148,-1.856 181.092,-1.904 180.964,-1.976 180.821,-2.01 180.674,-2.006 180.602,-1.989 172.713,-0.783 172.712,-0.783 172.642,-0.767 172.51,-0.71 172.398,-0.619 172.313,-0.503 172.283,-0.438 172.048,-3.709 172.086,-3.646 172.187,-3.539 172.312,-3.462 172.453,-3.421 172.526,-3.415 172.533,-3.416
no net on Layer0 "Default Coverlay 2 Bottom" (split plane): -209.812,-33.378 -209.798,-33.378 -209.77,-33.379 -209.743,-33.382 -209.715,-33.386 -209.701,-33.389 -214.452,-29.78 -214.437,-29.81 -214.413,-29.872 -214.397,-29.937 -214.389,-30.004 -214.388,-30.037 -214.39,-30.082 -214.405,-30.172 -214.435,-30.258 -214.478,-30.338 -214.504,-30.375 -214.534,-30.393 -217.044,-33.057 -212.659,-35.251 -211.561,-35.8 -210.175,-33.519 -210.144,-33.489 -210.107,-33.464 -210.029,-33.422 -209.944,-33.394 -209.857,-33.379
no net on Layer0 "Default Coverlay 2 Bottom" (split plane): -198.275,-19.718 -198.269,-19.712 -198.21,-19.674 -198.082,-19.62 -197.944,-19.601 -197.806,-19.617 -197.739,-19.637 -200.551,-16.849 -200.545,-16.87 -200.535,-16.912 -200.528,-16.954 -200.524,-16.997 -200.524,-17.019 -200.526,-17.064 -200.541,-17.154 -200.57,-17.24 -200.613,-17.32 -200.64,-17.357 -200.646,-17.363 -203.976,-20.374 -204.037,-20.433 -204.182,-20.52 -204.347,-20.558 -204.515,-20.545 -204.596,-20.519 -201.427,-23.627 -201.452,-23.549 -201.465,-23.385 -201.428,-23.224 -201.346,-23.082 -201.29,-23.021
no net on Layer0 "Default Coverlay 2 Bottom" (split plane): 198.275,-19.718 201.29,-23.021 201.33,-23.062 201.395,-23.154 201.44,-23.257 201.463,-23.368 201.466,-23.424 201.465,-23.45 201.461,-23.502 201.451,-23.553 201.436,-23.603 201.427,-23.627 204.596,-20.519 204.515,-20.545 204.347,-20.558 204.182,-20.52 204.037,-20.433 203.976,-20.374 200.646,-17.363 200.64,-17.357 200.602,-17.302 200.548,-17.179 200.525,-17.047 200.534,-16.914 200.551,-16.849 197.739,-19.637 197.806,-19.617 197.944,-19.601 198.082,-19.62 198.21,-19.674 198.269,-19.712
no net on Layer0 "Default Coverlay 2 Bottom" (split plane): 128.224,-2.54 128.302,-2.546 128.454,-2.591 128.586,-2.677 128.689,-2.796 128.726,-2.866 128.752,1.222 128.712,1.152 128.605,1.033 128.468,0.951 128.314,0.911 128.234,0.908 123.805,0.878 123.726,0.884 123.573,0.929 123.44,1.016 123.337,1.138 123.3,1.208 123.3,-2.81 123.337,-2.743 123.438,-2.628 123.567,-2.545 123.713,-2.501 123.789,-2.495 123.791,-2.495 128.166,-2.543 128.173,-2.542 128.187,-2.541 128.202,-2.541 128.216,-2.54
no net on Layer0 "Default Coverlay 2 Bottom" (split plane): -123.791,-2.495 -123.789,-2.495 -123.713,-2.501 -123.567,-2.545 -123.438,-2.628 -123.337,-2.743 -123.3,-2.81 -123.3,1.208 -123.337,1.138 -123.44,1.016 -123.573,0.929 -123.726,0.884 -123.805,0.878 -128.234,0.908 -128.314,0.911 -128.468,0.951 -128.605,1.033 -128.712,1.152 -128.752,1.222 -128.726,-2.866 -128.685,-2.79 -128.57,-2.663 -128.42,-2.577 -128.252,-2.541 -128.166,-2.543
no net on Layer0 "Default Coverlay 2 Bottom" (split plane): 17.899,0.15 24.736,0.854 24.818,0.857 24.979,0.826 25.123,0.75 25.239,0.634 25.283,0.565 24.997,3.651 24.962,3.571 24.857,3.432 24.714,3.333 24.546,3.283 24.459,3.279 17.603,2.355 17.602,2.354 17.527,2.35 17.378,2.373 17.242,2.435 17.127,2.531 17.08,2.59 17.485,-0.245 17.509,-0.175 17.584,-0.047 17.691,0.057 17.821,0.127 17.892,0.149
no net on Layer0 "Default Coverlay 2 Bottom" (split plane): -17.899,0.15 -17.892,0.149 -17.821,0.127 -17.691,0.057 -17.584,-0.047 -17.509,-0.175 -17.485,-0.245 -17.08,2.59 -17.127,2.531 -17.242,2.435 -17.378,2.373 -17.527,2.35 -17.602,2.354 -17.603,2.355 -24.459,3.279 -24.546,3.283 -24.714,3.333 -24.857,3.432 -24.962,3.571 -24.997,3.651 -25.283,0.565 -25.239,0.634 -25.123,0.75 -24.979,0.826 -24.818,0.857 -24.736,0.854
no net on Layer0 "Default Coverlay 2 Bottom" (split plane): -155.957,-2.388 -155.954,-2.388 -155.879,-2.394 -155.737,-2.436 -155.61,-2.515 -155.51,-2.624 -155.471,-2.688 -155.66,0.712 -155.687,0.639 -155.771,0.507 -155.888,0.405 -156.029,0.339 -156.105,0.322 -156.109,0.321 -161.726,-0.101 -161.728,-0.101 -161.802,-0.099 -161.945,-0.066 -162.074,0.004 -162.181,0.107 -162.222,0.167 -161.973,-3.057 -161.942,-2.989 -161.853,-2.869 -161.737,-2.777 -161.599,-2.72 -161.526,-2.706 -161.523,-2.706
no net on Layer0 "Default Coverlay 2 Bottom" (split plane): 155.471,-2.688 155.51,-2.624 155.61,-2.515 155.737,-2.436 155.879,-2.394 155.954,-2.388 155.957,-2.388 161.523,-2.706 161.526,-2.706 161.599,-2.72 161.737,-2.777 161.853,-2.869 161.942,-2.989 161.973,-3.057 162.222,0.167 162.181,0.107 162.074,0.004 161.945,-0.066 161.802,-0.099 161.728,-0.101 161.726,-0.101 156.109,0.321 156.105,0.322 156.029,0.339 155.888,0.405 155.771,0.507 155.687,0.639 155.66,0.712
no net on Layer0 "Default Coverlay 2 Bottom" (split plane): -179.725,-4.317 -174.412,-3.651 -174.303,-3.674 -174.097,-3.761 -173.922,-3.899 -173.79,-4.078 -173.743,-4.179 -174.001,-0.445 -174.036,-0.553 -174.147,-0.752 -174.306,-0.915 -174.501,-1.032 -174.609,-1.07 -180.602,-1.989 -180.674,-2.006 -180.821,-2.01 -180.964,-1.976 -181.092,-1.904 -181.148,-1.856 -180.135,-4.827 -180.124,-4.741 -180.064,-4.579 -179.957,-4.444 -179.813,-4.348 -179.732,-4.319
GND on Top Layer "GND_L01_P004" (hatched 45Degree grid 0.508 track 0.203, pour order 4): -225.542,-49.576 226.543,-47.517 223.66,17.537 -224.719,7.243
GND on Signal Layer 2 "GND_L03_P000" (hatched 45Degree grid 0.508 track 0.203, pour order 0): -223.446,-46.99 228.64,-44.931 225.757,20.123 -222.622,9.83
GND on Signal Layer 1 "GND_L02_P003" (hatched 45Degree grid 0.508 track 0.203, pour order 3): -225.193,-48.038 226.892,-45.98 224.01,19.074 -224.37,8.781
GND on Bottom Layer "GND_L04_P002" (hatched 45Degree grid 0.508 track 0.203, pour order 2): -224.005,-46.99 228.08,-44.931 225.198,20.123 -223.181,9.83

## Silkscreen, mask and mechanical layers (free items; w line width, h text height)
Mechanical 1:
  drawing of 456 lines, arcs and shapes, not listed
Top Courtyard:
  lines w0.254: -11.198,-4.031 -11.198,-2.301 ; -6.998,-3.908 -6.998,-2.501 ; 7.002,-3.801 7.002,-2.401 ; 11.202,-3.604 11.202,-2.301
Mechanical 6:
  lines w0.1: -217.044,-33.057 -211.561,-35.8 ; -214.644,-29.634 -209.429,-33.596 ; -204.789,-20.33 -201.284,-23.768 ; -200.788,-16.613 -197.55,-19.825 ; -181.227,-1.626 -180.05,-5.075 ; -174.012,-0.415 -173.741,-4.188 ; -162.242,0.424 -161.95,-3.35 ; -155.675,0.975 -155.457,-2.952 ; -145.874,1.35 -145.766,-2.639 ; -138.475,-2.9 -138.447,1.425 ; -128.753,1.45 -128.725,-3.05 ; -123.3,-3.05 -123.3,1.45 ; -116.4,-3 -116.4,1.475 ; -32.225,0.85 -32.023,4.652 ; -25.303,0.346 -24.916,4.173 ; -17.52,-0.488 -17.048,2.811 ; 17.048,2.811 17.52,-0.488 ; 24.976,3.879 25.303,0.346 ; 32.038,4.384 32.225,0.85 ; 116.4,-3 116.4,1.475 ; 123.3,-3.05 123.3,1.45 ; 128.725,-3.05 128.753,1.45 ; 138.447,1.425 138.475,-2.9 ; 145.766,-2.639 145.874,1.35 ; 155.457,-2.952 155.675,0.975 ; 161.95,-3.35 162.242,0.424 ; 172.029,-3.973 172.3,-0.2 ; 180.05,-5.075 181.227,-1.626 ; 197.55,-19.825 200.788,-16.613 ; 201.284,-23.768 204.789,-20.33 ; 209.429,-33.596 214.644,-29.634
Mechanical 7:
  drawing of 236 lines, arcs and shapes, not listed
Mechanical 8:
  drawing of 301 lines, arcs and shapes, not listed